# Altium PCB 60V_Ind.PcbDoc
Units mil, origin at the board's own origin, x right, y up, seen from the top; angles counter-clockwise.
Board outline 1600 x 800 mil, 2 copper layers (Top Layer, Bottom Layer), stack 58.8 mil thick; 7 components, 4 nets, 17 pads, 0 vias.
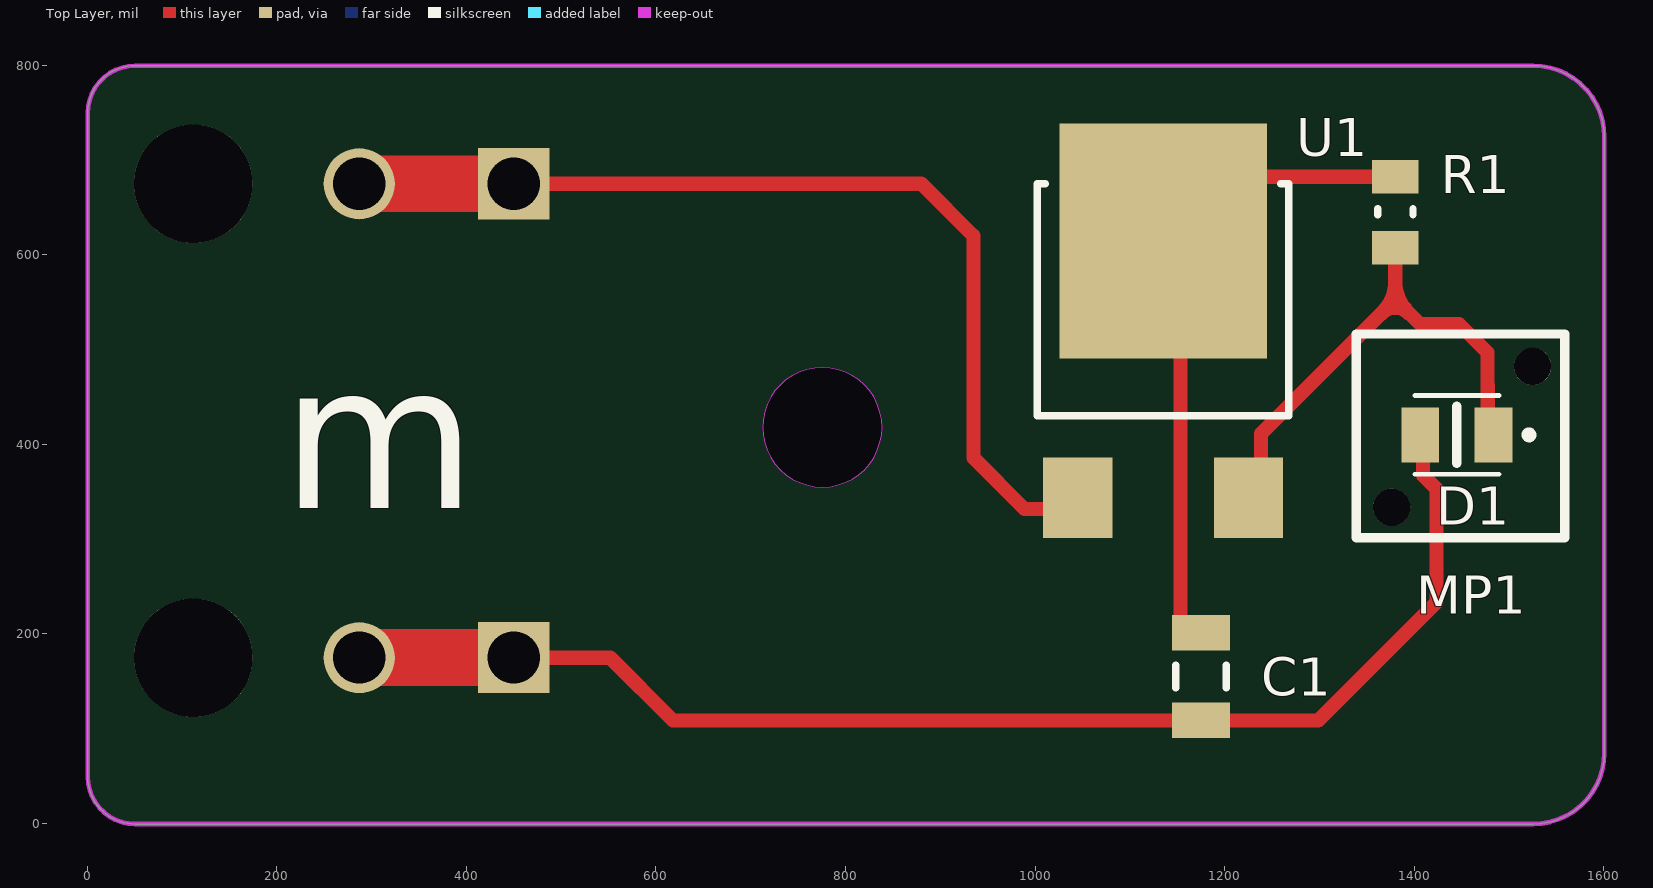
[diagram p0: Top Layer view]
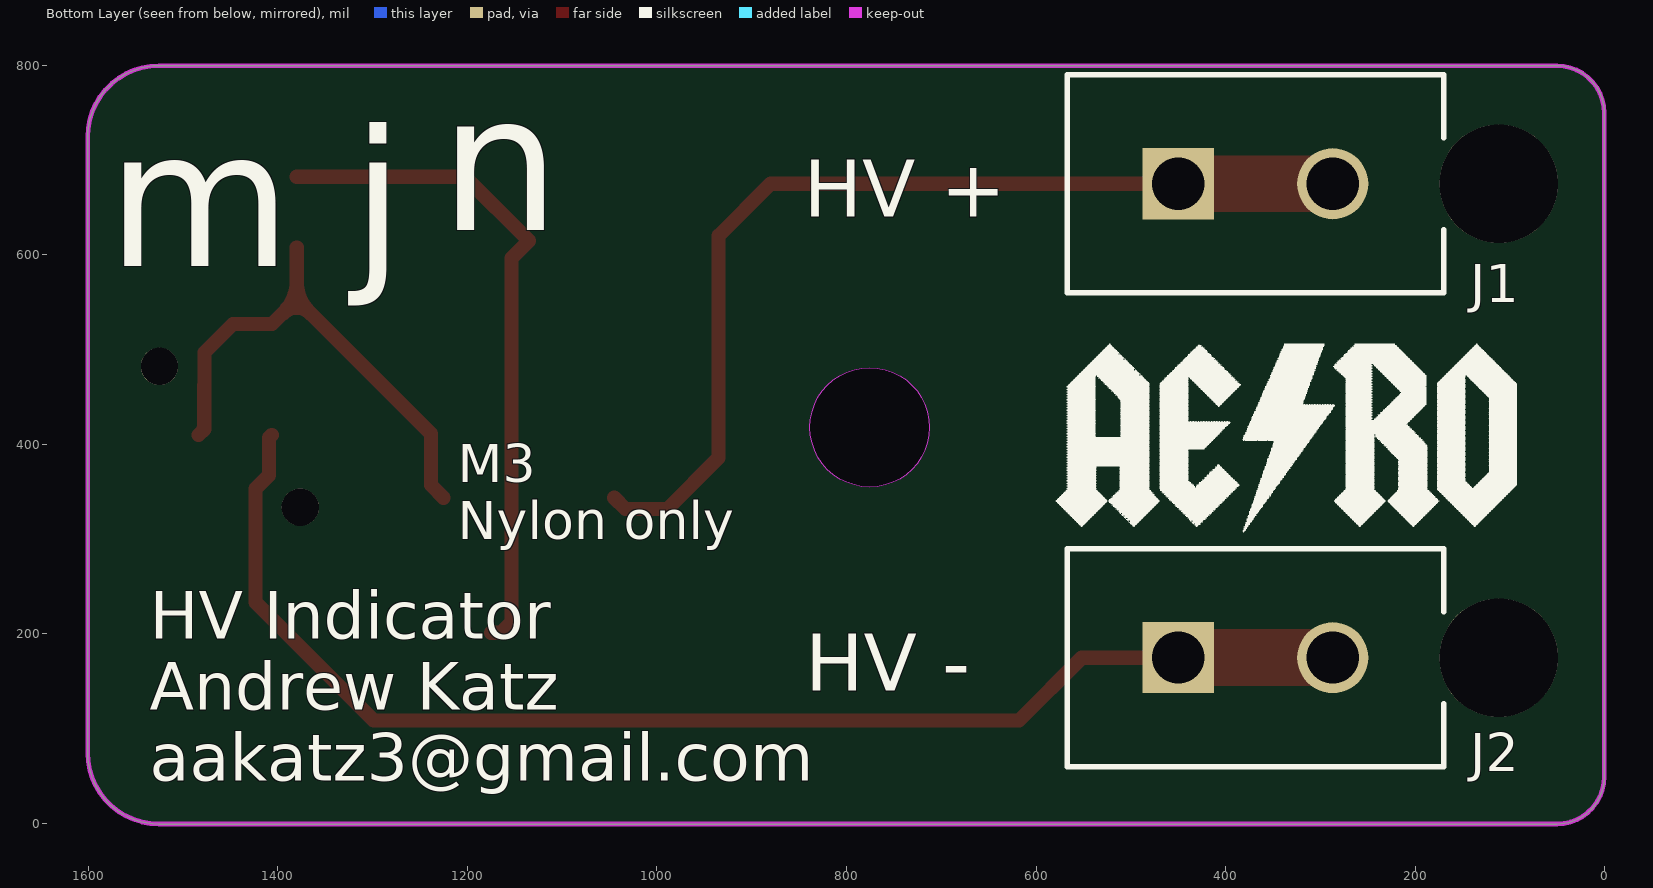
[diagram p1: Bottom Layer view, seen from below]
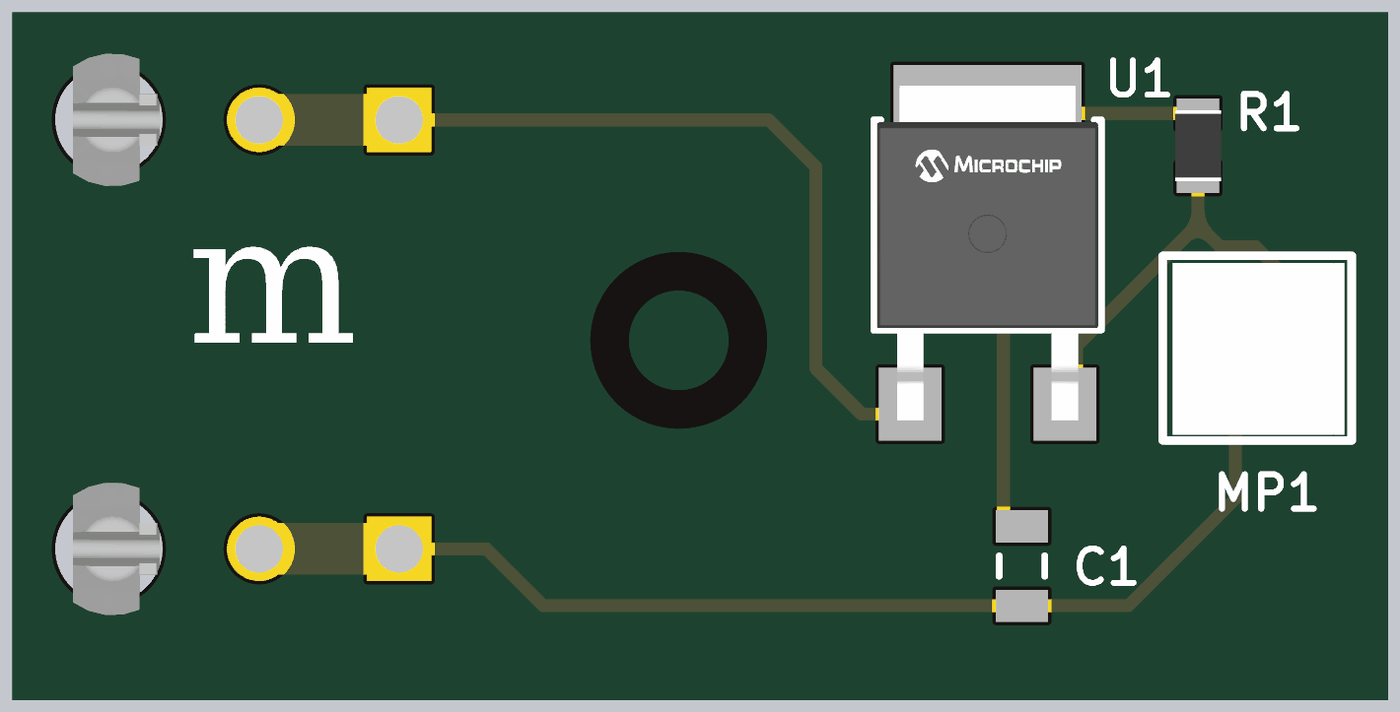
[diagram p2: 3D render of the assembled board from above, using the file's embedded part models]

## Layer stack, top to bottom
Top Solder: solder mask 1, SM-001, Dk 4
Top Layer: signal copper 1.4
Dielectric 1: core 56, FR-4, Dk 4.2
Bottom Layer: signal copper 1.4
Bottom Solder: solder mask 1, SM-001, Dk 4

## Board outline
50.5,-0.5 cw(c50.5,49.5) 0.5,49.5 0.5,749.5 cw(c50.5,749.5) 50.5,799.5 1525.5,799.5 cw(c1525.5,724.5) 1600.5,724.5 1600.5,74.5 cw(c1525.5,74.5) 1525.5,-0.5
cut-out: 712.51,418.01 ccw(c775.5,418.01) 775.5,355.02 ccw(c775.5,418.01) 838.49,418.01 ccw(c775.5,418.01) 775.5,481 ccw(c775.5,418.01)

## Design rules (kind name [scope] priority, off if disabled: settings)
Clearance Clearance_1 [InNetClass('TS') vs InNetClass('TS')] p1: gap=118.11 ignorepadtopadclearanceinfootprint=FALSE except(0: Arc-Text Arc-Hole Track-Text Track-Hole SMDPad-Text SMDPad-Hole THPad-Text THPad-Hole Via-Text Via-Hole Fill-Text Fill-Hole Poly-Text Poly-Hole Region-Text Region-Hole Text-Text Text-Hole)
Clearance [All] p2: gap=20 ignorepadtopadclearanceinfootprint=FALSE except(0: Arc-Hole Track-Hole SMDPad-Hole THPad-Hole Via-Hole Fill-Hole Poly-Hole Region-Hole Text-Hole; 10: Arc-Text Track-Text SMDPad-Text THPad-Text Via-Text Fill-Text Poly-Text Region-Text Text-Text)
ComponentClearance [All] p1: gap=3 collisioncheckmode=3 verticalgap=2 showdistances=TRUE
Creepage [InNetClass('TS') vs InNetClass('TS')] p1: checkdistance=40
HoleSize [All] p1: absolutevalues=TRUE maxlimit=500 minlimit=1 maxpercent=80.000 minpercent=20.000
PasteMaskExpansion PasteMaskExpansion_1 [IsVia or IsThruPin] p1: expansion=-1000
PasteMaskExpansion [Not IsVia and Not IsThruPin] p2: expansion=0
PolygonConnect [All] p1: connectstyle=Relief reliefconductorwidth=10 reliefentries=4 polygonreliefangle="90 Angle" airgapwidth=10
RoutingVias [All] p1: holewidth=28 width=50 viastyle="Through Hole" minholewidth=15 minwidth=30 maxholewidth=28 maxwidth=50
SilkToSilkClearance [All] p1: silktosilkclearance=5
SilkToSolderMaskClearance [IsPad] p1: minsilkscreentomaskgap=5 clearancetoexposedcopper=TRUE
SolderMaskExpansion via [IsVia] p1: expansion=4 istentingtop=TRUE
SolderMaskExpansion [All] p2: expansion=4 istentingtop=FALSE
Width [All] p1: maxlimit=60 minlimit=10 preferedwidth=10 minimp=50.000000 maximp=50.000000 favimp=50.000000
25 further rules are at their usual default settings.

## Classes and differential pairs
net class TS: GND HV+

## Components (designator, comment, footprint, x,y, rotation, side; value= is the part's Value field where it differs from the comment)
C1 "C2012X7S2A105K125AB" CAPC2013X145X20ML20 1175,155 r270 top
D1 "SM0805HCL" LEDC2012X135N_SM0805UGC(Primary) 1445,410 r180 top
J1 "1-770872-0" CON2_1X2_P163_VM 450,675 r180 bottom value=Value
J2 "1-770872-0" CON2_1X2_P163_VM 450,175 r180 bottom value=Value
MP1 "LPA-C011301S-10" LPA-C011301S-10 1453.94,411.46 r0 top locked
R1 "KTR10EZPF6040" RESC2012X06N_HV 1380,645 r90 top
U1 "LR8K4-G" Microchip_C04-189_MFG 1135,520 r0 top

## Footprints (in the part's own frame and the unit in brackets; to place one, negate y for a bottom-side part, rotate by r counter-clockwise, add the part's x,y. Pads: shape width x height; smd on the part's side, far side on the other; paste and mask are expansions set on the pad)
CAPC2013X145X20ML20 [mm]
  rect 0.95x1.55 smd: 1(-1.175,0) 2(1.175,0)
  silkscreen extent -0.3,-0.67 0.3,0.67, body extent -1.1,-0.72 1.1,0.72, height 1.45
CON2_1X2_P163_VM [mil]
  rect 75x75 hole 55: 1(0,0)
  round 75 hole 55: 2(162.99,0)
  round 125 hole 125 unplated: 3(338,0)
  silkscreen extent -117,-115 280,115, body extent -159,-140 380,110, height 566
LEDC2012X135N_SM0805UGC(Primary) [mm]
  rect 1.01x1.47 smd: A(-0.98,0) C(0.98,0)
  silkscreen extent -2.03,-1.05 1.13,1.05, body extent -1,-0.62 1,0.62, height 1.12
LPA-C011301S-10 [mm]
  round 1 hole 1 unplated paste-2.54 mask-2.54: M1(-1.973,-1.975) M1(1.8,1.8)
  silkscreen extent -2.92,-2.79 2.67,2.67, body extent -2.63,-2.63 2.45,2.45, height 14.65
Microchip_C04-189_MFG [mil]
  rect 73x85 smd: 1(-90,-176.25) 3(90,-176.25)
  rect 219x248 smd: 4(0,94.75)
  silkscreen extent -132,-90 132,155, body extent -129,-195 129,195, height 99
RESC2012X06N_HV [mm] "Chip Resistor, 2-Leads, Body 2.00x1.25mm, IPC Medium Density"
  rect 0.9x1.25 smd: 1(-0.95,0) 2(0.95,0)
  silkscreen extent -0.07,-0.48 0.09,0.48, body extent -1.05,-0.67 1.05,0.67, height 0.65

## Part data
C1: "Chip Capacitor, 1 uF, +/- 10%, 100 V, -55 to 125 degC, 0805 (2012 Metric), RoHS, Tape and Reel", Capacitance=1µF, Manufacturer=TDK, Operating Temperature=-55degC~125degC, Package / Case=0805(2012Metric), Package Description="2-Pin Surface Mount Device, Body 2 x 1.25 mm", Package Reference=805, PCN Part Number=MLCCPartNumberChange30/Nov/2012, Ratings=-, Standard Package=1, Supplier Part Number 1=445-5205-1-ND, Temperature Coefficient=X7S, Tolerance=±10%, Voltage - Rated=100V, Applications=GeneralPurpose, Catalog Drawings=CSERIES_2012-0805_1.45, Category=Capacitors, Datasheet URL=https://datasheet.ciiva.com/24216/c2012x7s2a105k125ab-265082-24216433.pdf, Datasheet Version=Sep-13, Family=CeramicCapacitors, Featured Product=Compact,High-CapacitanceMultilayerCeramicChipCapacitorsMidVoltageX7S-100VMLCCsC-SeriesMidVoltageMLCCs, Features=-, Height - Seated (Max)=-, Kits=445-9009-KIT-ND-KITCAPCERHICAP100V-630VSMDSAMPLEKIT1008-ND-KITCAPCERMLCC100V-630V, Lead Spacing=-, Lead Style=-, Manufacturer 1=TDK, Manufacturer Part Number 1=C2012X7S2A105K125AB, Manufacturer URL=http://www.tdk.com/, Mounting Type=SurfaceMount,MLCC, Online Catalog=CSeries,MidVoltage, Other Names=445-5205-1, Packaging=CutTape(CT), Product Training Modules=SEAT,CCV,andTVCLDesignToolsCSeriesMidVoltageCapacitorsFamilyGuidetoReplacinganElectrolyticCapacitorwithanMLCC, RoHS Information=RoHSCertificate-MLCC, Series=C, Size / Dimension="0.079\"Lx0.049\"W(2.00mmx1.25mm)", Supplier 1=Digi-Key, Supplier 2=Arrow, Supplier Part Number 2=C2012X7S2A105K, Thickness (Max)="0.053\"(1.35mm)"
D1: "Red 631nm LED Indication - Discrete 1.9V 0805 (2012 Metric)", Supplier Part Number 1=492-2281-1-ND, Supplier 1=Digi-Key
J1 J2: "Connector Header Through Hole 2 position 0.163\" (4.14mm)", Supplier Part Number 1=A32449-ND, Built_By=EMA_UL_Team, Copyright="Copyright (C) 2018 Accelerated Designs. All rights reserved", Manufacturer_Part_Number=1-770872-0, RefDes=RefDes, Supplier 1=Digi-Key, Type=DEV, Vendor="TE Connectivity"
MP1: "Light Pipe Single Clear Rigid Round with Flat Top, 3mm Board Mount, Press Fit", Supplier Part Number 1=67-1833-ND, Supplier 1=Digi-Key
R1: "604 Ohms ±1% 0.125W, 1/8W Chip Resistor 0805 (2012 Metric) Automotive AEC-Q200, High Voltage Thick Film", Case Code (Imperial)=0805, Case Code (Metric)=2012, High Voltage="High Voltage", Manufacturer=Rohm, Max Operating Temperature=155°C, Max Power Dissipation=125mW, Min Operating Temperature=-55°C, Package Quantity=5000, Resistance=604R, Supplier Part Number 1=RHM604AHCT-ND, Temperature Coefficient=100ppm/°C, Tolerance=1%, Case/Package=0805, Category="Chip SMD Resistors", Composition="Thick Film", Features="Automotive AEC-Q200", Height=0.026inch, Length=0.079inch, Manufacturer Part Number=KTR10EZPF6040, Number of Terminations=2, Packaging="Tape and Reel", Supplier 1=Digi-Key, Width=0.049inch
U1: "Linear Voltage Regulator IC Positive Adjustable 1 Output  10mA TO-252, (D-Pak)", Supplier Part Number 1=LR8K4-GCT-ND, Supplier 1=Digi-Key

## Nets (pads, with @x,y where several pads share a name; then routed paths per layer and width w, separated by ;. In a path a pad name is that pad's centre, name@x,y a point inside that pad or via, vN(x,y) a via of type N, cw(c..) or ccw(c..) an arc to the next point about the centre after c; other vN are vias at no path point)
ADJ: D1.A R1.1 U1.3 | length 538.1
  Top Layer w15: U1.3 1238.39,357.14 1238.39,411.32 1380,552.93 ; R1.1 1380,552.93 ; D1.A 1477.53,416.05 1477.53,462.43 1477.31,462.65 1477.31,497.01 1447.33,526.99 1405.94,526.99 1380,552.93
GND: C1.2 D1.C J2.1 J2.2 | length 1399.1
  Top Layer w15: J2.1 551.81,175 618.07,108.74 C1.2 1298.74,108.74 1423.45,233.45 1423.45,353.26 1409.36,367.35 1409.36,407.05 D1.C
  Top Layer w60: J2.2 J2.1
HV+: J1.1 J1.2 U1.1 | length 1042.2
  Top Layer w15: J1.1 880,675 935,620 935,385.79 988.86,331.93 1033.18,331.93 U1.1
  Top Layer w60: J1.2 J1.1
VOUT: C1.1 R1.2 U1.4 | length 709.2
  Top Layer w15: C1.1 1164.6,201.26 1153.4,212.46 1153.4,596.35 U1.4 1202.65,682.4 R1.2
pads on no net: J1.3 J2.3 MP1.M1

## Keep-outs
Keep-Out Layer:
  the board outline again, w5

## Silkscreen, mask and mechanical layers (free items; w line width, h text height)
Top Overlay:
  lines w10: 1445,380 1445,440
  text "m" at 205,275 h300
Bottom Overlay:
  drawing of 5 lines, arcs and shapes, not listed
  text "u" at 1101.79,782.85 h250 r180
  text "HV +" at 845,640 h60
  text "m j" at 1580,540 h250
  text "M3 / Nylon only" at 1210.24,299.79 h40
  text "HV -" at 843.53,140 h60
  text "HV Indicator / Andrew Katz / aakatz3@gmail.com" at 1535,45 h50
Top Solder:
  circle w45: c775.5,418.01 r80.52
Bottom Solder:
  circle w45: c775.5,418.01 r80.56
Board:
  lines w1: 0.5,49.5 ccw(c50.5,49.5) 50.5,-0.5 1525.5,-0.5 ccw(c1525.5,74.5) 1600.5,74.5 1600.5,724.5 ccw(c1525.5,724.5) 1525.5,799.5 50.5,799.5 ccw(c50.5,749.5) 0.5,749.5 0.5,49.5 ; 712.51,418.01 cw(c775.5,418.01) 775.5,481 cw(c775.5,418.01) 838.49,418.01 cw(c775.5,418.01) 775.5,355.02 cw(c775.5,418.01) 712.51,418.01
Drill Drawing:
  lines w10: -143.51,5411.72 -76.84,5411.72 -76.84,5478.38 -143.51,5478.38 -143.51,5411.72 ; -143.51,5628.38 -76.84,5628.38 -110.18,5561.72 -143.51,5628.38 ; -143.51,5728.38 -126.84,5728.38 -110.18,5711.72 -93.51,5728.38 -76.84,5728.38 -93.51,5745.05 -76.84,5761.72 -93.51,5761.72 -110.18,5778.38 -126.84,5761.72 -143.51,5761.72 -126.84,5745.05 -143.51,5728.38
  lines w15: -203.3,5366.72 7056.72,5366.72 ; -203.3,5816.72 7056.72,5816.72 ; 347.57,5216.72 347.57,5966.72 ; 827.45,5216.72 827.45,5966.72 ; 1967.12,5216.72 1967.12,5966.72 ; 2473,5216.72 2473,5966.72 ; 3206.8,5216.72 3206.8,5966.72 ; 4706.35,5216.72 4706.35,5966.72 ; 5296.2,5216.72 5296.2,5966.72 ; 6042,5216.72 6042,5966.72 ; -203.3,5216.72 7056.72,5216.72 7056.72,5966.72 -203.3,5966.72 -203.3,5216.72
  text "Symbol" at -113.3,5861.72 h72
  text "Count" at 392.57,5861.72 h72
  text "Hole Size" at 872.45,5861.72 h72
  text "Plated" at 2012.12,5861.72 h72
  text "Hole Type" at 2518,5861.72 h72
  text "Drill Layer Pair" at 3251.8,5861.72 h72
  text "Via/Pad" at 4751.35,5861.72 h72
  text "Pad Shape" at 5341.2,5861.72 h72
  text "Template" at 6087,5861.72 h72
  text "2" at 392.57,5711.72 h60
  text "39.37mil (1.000mm)" at 872.45,5711.72 h60
  text "NPTH" at 2012.12,5711.72 h60
  text "Round" at 2518,5711.72 h60
  text "Top Layer - Bottom Layer" at 3251.8,5711.72 h60
  text "Pad" at 4751.35,5711.72 h60
  text "Rounded" at 5341.2,5711.72 h60
  text "c100hn100m0p354" at 6087,5711.72 h60
  text "2" at 392.57,5561.72 h60
  text "125.00mil (3.175mm)" at 872.45,5561.72 h60
  text "NPTH" at 2012.12,5561.72 h60
  text "Round" at 2518,5561.72 h60
  text "Top Layer - Bottom Layer" at 3251.8,5561.72 h60
  text "Pad" at 4751.35,5561.72 h60
  text "Rounded" at 5341.2,5561.72 h60
  text "c318hn318" at 6087,5561.72 h60
  text "4" at 392.57,5411.72 h60
  text "55.00mil (1.397mm)" at 872.45,5411.72 h60
  text "PTH" at 2012.12,5411.72 h60
  text "Round" at 2518,5411.72 h60
  text "Top Layer - Bottom Layer" at 3251.8,5411.72 h60
  text "Pad" at 4751.35,5411.72 h60
  text "(Mixed)" at 5341.2,5411.72 h60
  text "(Mixed)" at 6087,5411.72 h60
  text "8 Total" at 392.57,5261.72 h60
Sheet:
  drawing of 46 lines, arcs and shapes, not listed
  text "1" at 45.05,7062.28 h48.41
  text "2" at 2787.75,7062.28 h48.41
  text "3" at 5541.29,7062.28 h48.41
  text "4" at 8286.49,7062.28 h48.41
  text "A" at -1227.81,6099.84 h48.41
  text "A" at 9571.87,6099.84 h48.41
  text "B" at -1222.8,3974.63 h48.41
  text "B" at 9576.04,3974.63 h48.41
  text "C" at -1223.64,1849.42 h48.41
  text "C" at 9575.21,1849.42 h48.41
  text "D" at -1226.14,-275.78 h48.41
  text "D" at 9572.71,-275.78 h48.41
  text "'.Pcb_File_Name_No_Path'" at 5503.73,-446.35 h63.44
  text "Title:" at 5154.01,-456.92 h65.94
  text "*" at 5404.41,-570.44 h32.55
  text "*" at 5404.41,-630.54 h32.55
  text "Desc:" at 5154.01,-643.06 h41.74
  text "*" at 5404.41,-690.64 h32.55
  text "Letter" at 5354.33,-838.39 h41.74
  text "Auth:" at 5754.13,-838.39 h41.74
  text "'.ProjAuth'" at 6003.69,-838.39 h41.74
  text "Proj:" at 6854.21,-838.39 h41.74
  text "'.ProjName'" at 7053.7,-838.39 h41.74
  text "Size:" at 5154.01,-843.4 h41.74
  text "Date:" at 5154.01,-984.47 h36.73
  text "'.ModifiedDate'" at 5404.41,-984.47 h36.73
  text "'.ModifiedTime'" at 6364.27,-984.47 h36.73
  text "'.Print_Scale'" at 6854.21,-984.47 h36.73
  text "www.uvmaero.org" at 8529.1,-984.47 h36.73
  text "File:" at 5154.01,-1084.63 h36.73
  text "'.Pcb_File_Name'" at 5404.41,-1084.63 h36.73
  text "1" at 45.05,-1238.22 h48.41
  text "2" at 2787.75,-1238.22 h48.41
  text "3" at 5541.29,-1238.22 h48.41
  text "4" at 8286.49,-1238.22 h48.41
Old Board Outlin:
  circle w0.5: c775.5,418.01 r62.99
  circle w0.5: c287.51,674.5 r27.56
  circle w0.5: c450.5,674.5 r27.56
  circle w0.5: c112.7,674.5 r62.6
  circle w0.5: c450.5,174.5 r27.56
  circle w0.5: c287.51,174.5 r27.56
  circle w0.5: c112.7,174.5 r62.6
  circle w0.5: c1376.09,333.76 r19.68
  circle w0.5: c1524.91,482.57 r19.68
  lines w0.5: 0.5,49.5 ccw(c50.5,49.5) 50.5,-0.5 1525.5,-0.5 ccw(c1525.5,74.5) 1600.5,74.5 1600.5,724.5 ccw(c1525.5,724.5) 1525.5,799.5 50.5,799.5 ccw(c50.5,749.5) 0.5,749.5 0.5,49.5
Fab Notes:
  drawing of 334 lines, arcs and shapes, not listed
  text "Layer" at 5116.17,2980.69 h60
  text "Name" at 5526.09,2980.69 h60
  text "Material" at 6455.83,2980.69 h60
  text "Thickness" at 7015.69,2980.69 h60
  text "Constant" at 7665.53,2980.69 h60
  text "Board Layer Stack" at 8235.39,2980.69 h60
  text "Top Overlay" at 5526.09,2860.69 h60
  text "Top Solder" at 5526.09,2740.69 h60
  text "SM-001" at 6455.83,2740.69 h60
  text "1.00mil" at 7015.69,2740.69 h60
  text "4" at 7665.53,2740.69 h60
  text "1" at 5116.17,2620.69 h60
  text "Top Layer" at 5526.09,2620.69 h60
  text "Copper" at 6455.83,2620.69 h60
  text "1.40mil" at 7015.69,2620.69 h60
  text "Dielectric 1" at 5526.09,2500.69 h60
  text "FR-4" at 6455.83,2500.69 h60
  text "56.00mil" at 7015.69,2500.69 h60
  text "4.2" at 7665.53,2500.69 h60
  text "2" at 5116.17,2380.69 h60
  text "Bottom Layer" at 5526.09,2380.69 h60
  text "Copper" at 6455.83,2380.69 h60
  text "1.40mil" at 7015.69,2380.69 h60
  text "Bottom Solder" at 5526.09,2260.69 h60
  text "SM-001" at 6455.83,2260.69 h60
  text "1.00mil" at 7015.69,2260.69 h60
  text "4" at 7665.53,2260.69 h60
  text "Bottom Overlay" at 5526.09,2140.69 h60

## Dimensions
1525.5,74.5 to 1725.29,-115.81 on Dimensions
1525.5,799.5 to 1485.86,-0.75 on Dimensions
0.5,749.5 to 1600.78,504.19 on Dimensions
775.5,418.01 to 1390,600 on Dimensions